# Altium PCB Main_Board.PcbDoc
Units mil, origin at the board's own origin, x right, y up, seen from the top; angles counter-clockwise.
Board outline 3000 x 2500 mil, 2 copper layers (Top Layer, Bottom Layer); 24 components, 27 nets, 88 pads, 3 vias.
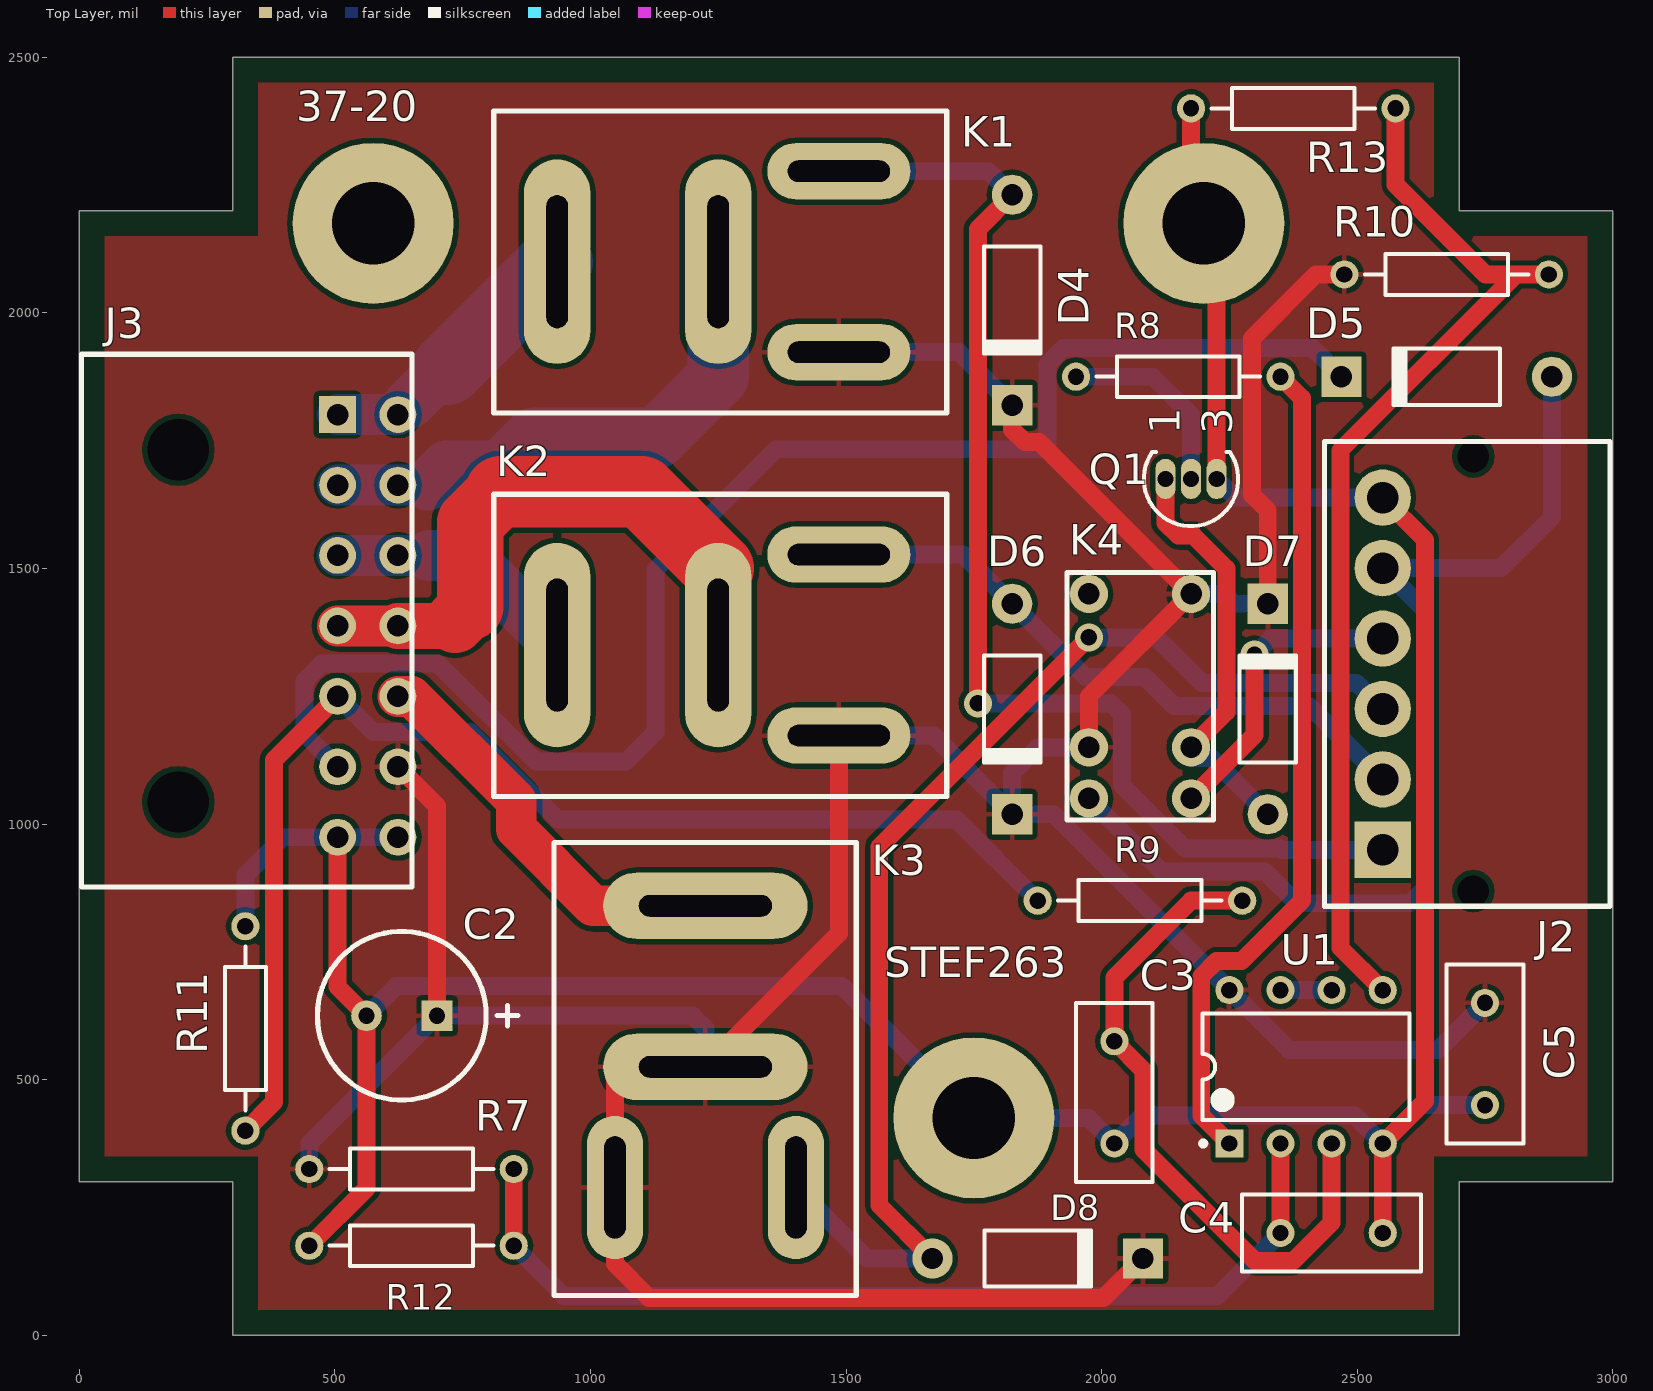
[diagram p0: Top Layer view]
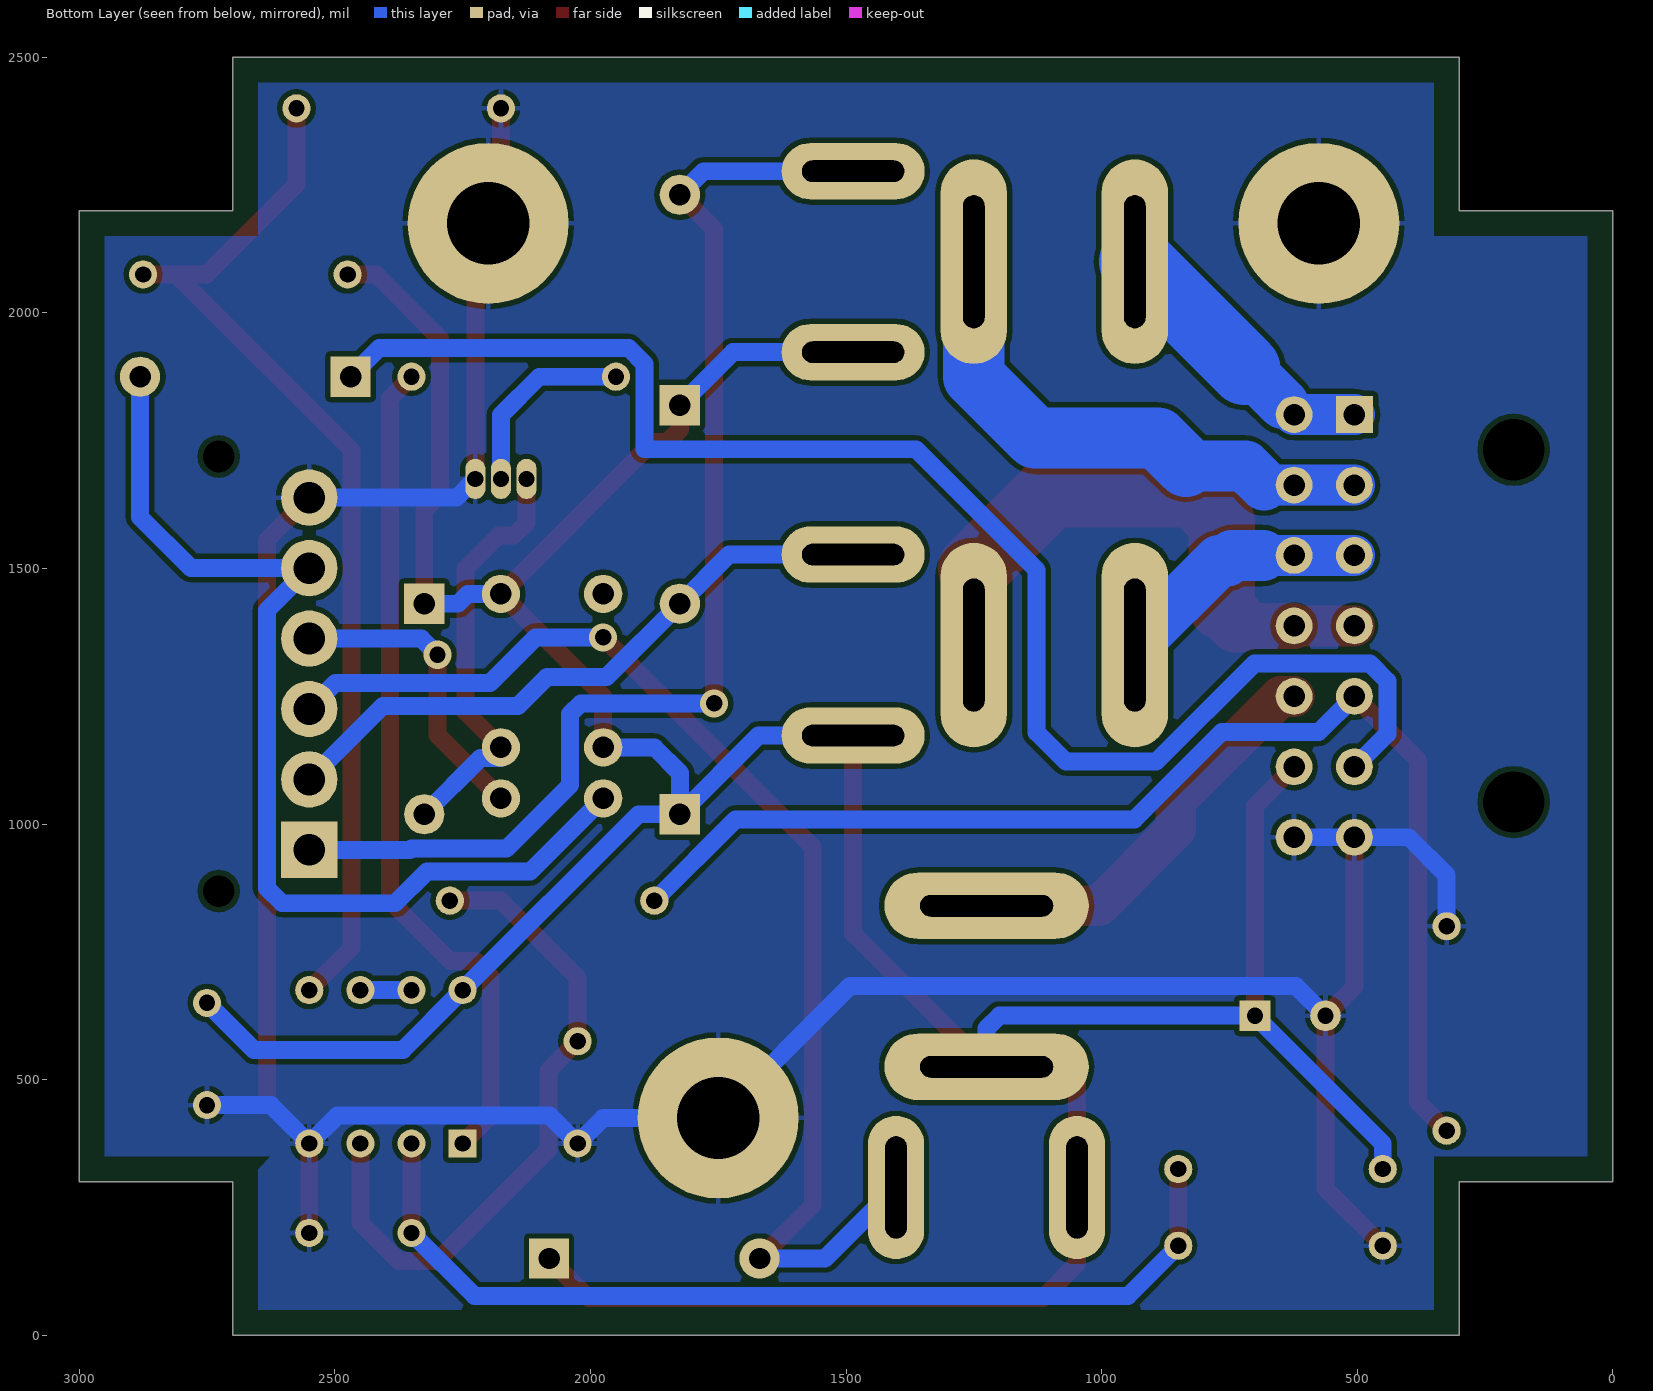
[diagram p1: Bottom Layer view, seen from below]

## Layer stack, top to bottom
Top Solder: solder mask 0.4, Solder Resist, Dk 3.5
Top Layer: signal copper 1.4
Dielectric 1: dielectric 12.6, FR-4, Dk 4.8
Bottom Layer: signal copper 1.4
Bottom Solder: solder mask 0.4, Solder Resist, Dk 3.5

## Board outline
300,0 300,300 0,300 0,2200 300,2200 300,2500 2700,2500 2700,2200 3000,2200 3000,300 2700,300 2700,0

## Design rules (kind name [scope] priority, off if disabled: settings)
Clearance [All] p1: gap=10 ignorepadtopadclearanceinfootprint=FALSE
HoleSize [All] p1: absolutevalues=TRUE maxlimit=250 minlimit=1 maxpercent=80.000 minpercent=20.000
PolygonConnect [All] p1: connectstyle=Relief reliefconductorwidth=10 reliefentries=4 polygonreliefangle="90 Angle" airgapwidth=10
RoutingVias [All] p1: holewidth=32 width=55 viastyle="Through Hole" minholewidth=32 minwidth=55 maxholewidth=32 maxwidth=55
SolderMaskExpansion [All] p1: expansion=4
Width [All] p1: maxlimit=200 minlimit=20 preferedwidth=35
29 further rules are at their usual default settings.

## Components (designator, comment, footprint, x,y, rotation, side; value= is the part's Value field where it differs from the comment)
C2 "Cap Pol1" RB_3.5MM 700,625 r180 top value=100uF/25V
C3 "Cap" RAD-0.2 2025,475 r90 top value=1uF/16V
C4 "Cap" RAD-0.2 2450,200 r180 top value=1uF/16V
C5 "Cap" RAD-0.2 2750,550 r90 top value=1uF/16V
D4 "1N4001" DO-41 1825,2025 r270 top
D5 "1N4001" DO-41 2675,1875 r180 top
D6 "1N4001" DO-41 1825,1225 r270 top
D7 "1N4001" DO-41 2325,1225 r90 top
D8 "1N4001" DO-41 1875,150 r0 top
J2 "FP_CONNECTOR" MOLEX_5329_6POS_RA 2727.17,868.7 r90 top
J3 "Molex 1723161114" MOLEX_ULTRA_FIT_14_POS_RA 505.42,1800.87 r270 top
K1 "ACV31012" RL_MICRO_ISO_ACV 1486,2277 r180 top
K2 "ACV31012" RL_MICRO_ISO_ACV 1486,1527 r180 top
K3 "ACV31012" RL_MICRO_ISO_ACV 1402,289 r90 top
K4 "G5V-1-2 DC12" RL_G5V-1 2175,1050 r90 top
Q1 "2N3904" TO-92 2175,1675 r90 top
R7 "Res1" AXIAL-0.4 650,325 r0 top value=8.2K
R8 "Res1" AXIAL-0.4 2150,1875 r180 top value=10K
R9 "Res1" AXIAL-0.4 2075,850 r180 top value=10K
R10 "Res1" AXIAL-0.4 2675,2075 r0 top value=10K
R11 "Res1" AXIAL-0.4 325,600 r270 top value=10K
R12 "Res1" AXIAL-0.4 650,175 r180 top value=1K
R13 "Res1" AXIAL-0.4 2375,2400 r0 top value=10K
U1 "LM358" DIP-8 2400,525 r90 top

## Footprints (in the part's own frame and the unit in brackets; to place one, negate y for a bottom-side part, rotate by r counter-clockwise, add the part's x,y. Pads: shape width x height; smd on the part's side, far side on the other; paste and mask are expansions set on the pad)
AXIAL-0.4 [mm] "Axial Device, Thru-Hole; 2 Leads; 0.4 in Pin Spacing"
  round 1.4 hole 0.813: 1(-5.08,0) 2(5.08,0)
  silkscreen extent -4.06,-1.02 4.06,1.02
DIP-8 [mil] "DIP; 8 Leads; Row Spacing 7.62 mm; Pitch 2.54 mm"
  rect 55x55 hole 32: 1(-150,150)
  round 55 hole 32: 2(-150,50) 3(-150,-50) 4(-150,-150) 5(150,-150) 6(150,-50) 7(150,50) 8(150,150)
  silkscreen extent -155,-203 104,206, body extent -142,-203 142,203, height 200
DO-41 [mm] "Diode, Axial; Body 5.2 x 2.7 mm (LxDia. max), Lead Dia. 0.86 mm (max)"
  round 2 hole 1.067: 1(-5.23,0)
  rect 2x2 hole 1.067: 2(5.23,0)
  silkscreen extent -2.65,-1.4 2.75,1.4
MOLEX_5329_6POS_RA [mm]
  rect 2.8x2.8 hole 1.575: 1(2.05,4.5)
  round 2.8 hole 1.575: 2(5.55,4.5) 3(9.05,4.5) 4(12.55,4.5) 5(16.05,4.5) 6(19.55,4.5)
  round 0 hole 1.575: ""(0,0) ""(21.6,0)
  silkscreen extent -0.75,-6.8 22.35,7.4
MOLEX_ULTRA_FIT_14_POS_RA [mil]
  rect 72x72 hole 42: 1(0,0)
  round 72 hole 42: 2(0,118.11) 3(137.8,0) 4(137.8,118.11) 5(275.59,0) 6(275.59,118.11) 7(413.39,0) 8(413.39,118.11) 9(551.18,0) 10(551.18,118.11) 11(688.98,0) 12(688.98,118.11) 13(826.77,0) 14(826.77,118.11)
  round 0 hole 120: ""(68.9,-311.42) ""(757.87,-311.42)
  silkscreen extent -118,-501 924,145
RAD-0.2 [mil] "Radial Cap, Thru-Hole; 2 Leads; 0.2 in Pin Spacing"
  round 55 hole 32: 1(-100,0) 2(100,0)
  silkscreen extent -175,-75 175,75
RB_3.5MM [mil]
  rect 60x60 hole 32: 1(0,0)
  round 60 hole 32: 2(138,0)
  silkscreen extent -158,-165 234,165
RL_G5V-1 [mil]
  round 75 hole 42: 1(0,0) 2(100,0) 5(400,0) 6(400,200) 9(100,200) 10(0,200)
  silkscreen extent -42,-44 442,243
RL_MICRO_ISO_ACV [mil] "Micro-ISO Relay ACV series"
  oval 280x110 hole 42 slot 200 at 0 deg: 1(0,0) 2(0,354)
  oval 130x400 hole 42 slot 260 at 90 deg: 3(551,177) 5(236,177)
  silkscreen extent -211,-118 675,473
TO-92 [mm] "TO, Flat Index; 3 In-Line, Axial Leads; Body Dia. 4.6mm; Leads 0.41 x 0.39 mm (max)"
  oval 2x1 hole 0.813: 1(0,1.27) 2(0,0) 3(0,-1.27)
  silkscreen extent -2.34,-2.34 1.35,2.34

## Part data
C2: "UBW1E101MPD1TD", LatestRevisionDate=17-Jul-2002, LatestRevisionNote="Re-released for DXP Platform.", PackageDescription="Polarized Capacitor (Radial); 2 Leads", PackageReference=RB7.6-15, Published=8-Jun-2000, Publisher="Altium Limited"
C3 C4 C5: "FA26X8R1E105KNU06", LatestRevisionDate=17-Jul-2002, LatestRevisionNote="Re-released for DXP Platform.", PackageDescription="Radial Cap, Thru-Hole; 2 Leads; 0.3 in Pin Spacing", PackageReference=RAD-0.3, Published=8-Jun-2000, Publisher="Altium Limited"
D4 D5 D6 D7 D8: library part "Diode 1N4001", "1 Amp General Purpose Rectifier", Code_JEDEC=DO-204-AL, ComponentLink1Description="Manufacturer Link", ComponentLink1URL=http://www.fairchildsemi.com/, ComponentLink2Description=Datasheet, ComponentLink2URL=http://www.fairchildsemi.com/ds/1N%2F1N4001.pdf, DatasheetVersion=1998, LatestRevisionDate=17-Jul-2002, LatestRevisionNote="Re-released for DXP Platform.", PackageDescription="Diode, Axial; Body 5.2 x 2.7 mm (LxDia. max), Lead Dia. 0.86 mm (max)", PackageReference=DO-41, PackageVersion=Aug-1999, Published=8-Jun-2000, Publisher="Altium Limited"
J2: library part "Header 6", "Header, 6-Pin", LatestRevisionDate=17-Jul-2002, LatestRevisionNote="Re-released for DXP Platform.", Publisher="Altium Limited"
J3: library part "Header 7X2", "Header, 7-Pin, Dual row", LatestRevisionDate=17-Jul-2002, LatestRevisionNote="Re-released for DXP Platform.", Publisher="Altium Limited"
K1 K2 K3: library part Relay-SPST, "Single-Pole Single-Throw Relay", LatestRevisionDate=17-Jul-2002, LatestRevisionNote="Re-released for DXP Platform.", PackageReference=MODULE4, Published=24-Mar-1999, Publisher="Altium Limited"
K4: library part Relay-SPDT, "Single-Pole Dual-Throw Relay", LatestRevisionDate=17-Jul-2002, LatestRevisionNote="Re-released for DXP Platform.", PackageReference=MODULE5B, Published=24-Mar-1999, Publisher="Altium Limited"
Q1: library part NPN, "NPN Bipolar Transistor", Code_JEDEC=TO-226-AA, LatestRevisionDate=17-Jul-2002, LatestRevisionNote="Re-released for DXP Platform.", PackageDescription="TO, Flat Index; 3 In-Line, Axial Leads; Body Dia. 4.8mm; Leads 0.55 x 0.51 mm (max)", PackageReference=TO-226-AA, Published=8-Jun-2000, Publisher="Altium Limited"
R7 R8 R9 R10 R11 R12 R13: "Resistor", LatestRevisionDate=17-Jul-2002, LatestRevisionNote="Re-released for DXP Platform.", PackageDescription="Axial Device, Thru-Hole; 2 Leads; 0.3 in Pin Spacing", PackageReference=AXIAL-0.3, Published=8-Jun-2000, Publisher="Altium Limited"

## Free pads (board coordinates)
  round 315 hole 161: ""(575,2175) ""(1750,425) ""(2200,2175)

## Via types
v1: diameter 55, hole 32, Top Layer to Bottom Layer, 3 vias

## Nets (pads, with @x,y where several pads share a name; then routed paths per layer and width w, separated by ;. In a path a pad name is that pad's centre, name@x,y a point inside that pad or via, vN(x,y) a via of type N, cw(c..) or ccw(c..) an arc to the next point about the centre after c; other vN are vias at no path point)
ACC: C2.1 C5.2 D4.2 D6.2 D7.2 D8.2 J3.12 K1.2 K2.2 K3.2 K3.5 K4.5 K4.9 R7.1 R10.1 U1.8 | length 7969.6
  Top Layer w35: J3.12 700,1035.43 C2.1 ; K2.2 1486,786 K3.5 1048,525 K3.2 1048,140 1115,73 2003.91,73 D8.2 ; D4.2 1825,1772 1850,1747 1878,1747 K4.5 1975,1250 K4.9 ; D7.2 2325,1613 2294,1644 2294,1950 2419,2075 R10.1
  Bottom Layer w35: R7.1 450,375 C2.1 1200,625 1225,600 K3.5 ; K2.2 1671.09,1173 D6.2 ; K1.2 1721.09,1923 D4.2 ; K4.9 1875,1150 1825,1100 D6.2 ; K4.5 2240,1450 2259.09,1430.91 D7.2 ; C5.2 2658,558 2367,558 U1.8 1905.91,1019.09 D6.2
BL_LED: J2.4 K4.1 | length 596.5
  Top Layer w35: K4.1 2299,1174 v1(2299,1331)
  Bottom Layer w35: v1(2299,1331) 2330.8,1362.8 J2.4
GND: C2.2 C3.1 C4.1 C5.1 J2.6 J3.13 J3.14 pad. Q1.3 R11.1 R12.2 R13.1 U1.4 | length 6322.1
  Top Layer w35: R12.2 562,287 C2.2 505.42,681.58 J3.13 ; R13.1 2175,2175 2200,2175 2225,2150 Q1.3 ; C4.1 U1.4 2633,458 2633,1555.39 J2.6
  Bottom Layer w35: R11.1 325,900 399.1,974.1 J3.13 J3.14 ; C2.2 620,683 1492,683 1750,425 1975,425 C3.1 2080,430 2495,430 U1.4 2625,450 C5.1 ; Q1.3 2261.61,1638.39 J2.6
HEAT_SW: D6.1 J2.2 K2.1 | length 1246.2
  Bottom Layer w35: K2.1 1728.91,1527 D6.1 1968.53,1287.37 2085,1287.37 2141.37,1231 2406.2,1231 J2.2
HEATER_PWR: J3.7 J3.8 K2.5 | length 1162.1
  Top Layer w80: J3.7 J3.8 ; 727.49,1387.49 735,1395
  Top Layer w90: J3.8 727.49,1387.49
  Top Layer w120: 735,1395 765,1425 ; K2.5 K2.5@1250,1500
  Top Layer w130: 765,1425 765,1590 825,1650
  Top Layer w140: 825,1650 1100,1650 K2.5@1250,1500
ILLUMINATION: J3.9 R9.2 R11.2 | length 2459.6
  Top Layer w35: R11.2 381,456 381,1125.27 J3.9
  Bottom Layer w35: J3.9 575.11,1180 765,1180 936,1009 1716,1009 R9.2
NetC3_2: C3.2 R9.1 U1.3 | length 1317.1
  Top Layer w35: R9.1 2175,850 2025,700 C3.2 2082,518 2082,363 2300,145 2375,145 2450,220 U1.3
NetC4_2: C4.2 R7.2 R12.1 U1.2 | length 1916.5
  Top Layer w35: R12.1 R7.2 ; C4.2 U1.2
  Bottom Layer w35: R12.1 948,77 2227,77 C4.2
NetD1_1: 
NetD1_4: 
NetD2_1: 
NetD2_4: 
NetD3_1: 
NetD3_4: 
NetD7_1: D7.1 K4.2 Q1.1 | length 837
  Top Layer w35: Q1.1 2125,1589 2150,1564 2180,1564 2244,1500 2244,1219 K4.2
  Bottom Layer w35: K4.2 2175,1129 2215.09,1129 D7.1
NetQ1_2: Q1.2 R8.2 | length 381.1
  Bottom Layer w35: R8.2 2100,1875 2175,1800 Q1.2
NetR8_1: R8.1 U1.1 | length 1650.5
  Top Layer w35: U1.1 2195,430 2195,702 2225,732 2274,732 2392,850 2392,1833 R8.1
NetR10_2: R10.2 R13.2 U1.5 | length 2098.8
  Top Layer w35: U1.5 2467,758 2467,1731 2811,2075 ; R13.2 2575,2251 2751,2075 2811,2075 ; R10.2 2811,2075
NetU1_6: U1.6 U1.7 | length 100
  Bottom Layer w35: U1.7 U1.6
NIGHT_LIGHT: D5.2 J3.11 | length 2958.9
  Bottom Layer w35: J3.11 441,1176.32 441,1280 475,1314 701,1314 893,1122 1070,1122 1127,1179 1127,1497 1363,1733 1894,1733 1894,1900 1925,1931 2413.09,1931 D5.2
NOS_PWR: J3.3 J3.4 K1.5 | length 1057.4
  Bottom Layer w80: J3.3 J3.4 681.92,1663.08
  Bottom Layer w100: 681.92,1663.08 718.84,1700 835,1700
  Bottom Layer w120: 835,1700 890,1755 1130,1755 1250,1875 K1.5
NOS_SW: D4.1 J2.1 K1.1 | length 2372.9
  Top Layer w35: v1(1758,1236) 1758,2163.91 D4.1
  Bottom Layer w35: K1.1 1778.91,2277 D4.1 ; v1(1758,1236) 2019,1236 2040,1215 2040,1076 2163.78,952.22 2349.78,952.22 2352.59,949.41 J2.1
PURGE_PWR: J3.10 K3.3 | length 803.4
  Top Layer w35: K3.3@1100,840 K3.3
  Top Layer w80: J3.10 650.31,1249.69 855,1045 855,990 1005,840 K3.3@1100,840
PURGE_SW: D8.1 J2.3 K3.1 | length 2385.6
  Top Layer w35: D8.1 1565,254.09 1565,955 v1(1975,1365)
  Bottom Layer w35: K3.1 1541,150 D8.1 ; v1(1975,1365) 2107.47,1365 2196.47,1276 2499,1276 J2.3
RD_LED: D5.1 J2.5 K4.10 | length 2062.4
  Bottom Layer w35: K4.10 2117.78,907.22 2319.78,907.22 2382,845 2603,845 2633,875 2633,1417.59 J2.5 2781.5,1500.59 2880.91,1600 D5.1
VCC_HEATER: J3.5 J3.6 K2.3 | length 502.2
  Bottom Layer w80: J3.5 J3.6 684.72,1525.28
  Bottom Layer w100: 684.72,1525.28 744.72,1525.28 755,1515 770,1515 K2.3
VCC_NOS: J3.1 J3.2 K1.3 | length 555.6
  Bottom Layer w80: J3.1 J3.2 J3.2@645,1822.35 ; 712.65,1890 720,1890
  Bottom Layer w100: J3.2@645,1822.35 712.65,1890
  Bottom Layer w140: 720,1890 932.5,2102.5 K1.3
pads on no net: J2. J3. K4.6

## Polygon pours and split planes (outlines as drawn)
GND on Bottom Layer "bottom_layer_gnd" (solid, remove dead copper, pour order 28): 350,350 350,50 2650,50 2650,325 2625,350 2950,350 2950,2150 2650,2150 2650,2450 350,2450 350,2150 50,2150 50,350
ACC on Top Layer "top_layer_acc" (solid, remove dead copper, pour order 26): 50,350 350,350 350,50 2650,50 2650,350 2950,350 2950,2150 2650,2150 2650,2450 350,2450 350,2150 50,2150

## Silkscreen, mask and mechanical layers (free items; w line width, h text height)
Top Overlay:
  text "37-20" at 425,2375 h60
  text "STEF263" at 1575,700 h60
Top Solder:
  lines w50: 623.53,1111.9 638.1,1111.9 ; 623.53,1249.69 650.31,1249.69 815,1085 850,1050 850,1000 1010,840
  lines w80: 505.42,1387.49 623.53,1387.49 732.49,1387.49 765,1420
  lines w100: 765,1420 765,1590 820,1645 1105,1645 1250,1500 1250,1350
Bottom Solder:
  lines w60: 925,2100 935,2100
  lines w80: 505.42,1525.28 623.53,1525.28 744.72,1525.28 755,1515 770,1515 935,1350 ; 505.42,1663.08 683.08,1663.08 720,1700 830,1700 880,1750 1125,1750 1175,1800 1250,1875 1250,2100 ; 505.42,1800.87 625.87,1800.87 925,2100
ToolPath:
  lines w10: -5,300 ccw(c0,300) 0,295 ; -5,300 ccw(c0,300) 0,295 ; -5,300 -5,2200 ; -5,2200 cw(c0,2200) 0,2205 ; -5,2200 cw(c0,2200) 0,2205 ; 0,295 295,295 295,0 ; 0,2205 295,2205 295,2500 ; 295,0 ccw(c300,0) 300,-5 ; 295,0 ccw(c300,0) 300,-5 ; 295,2500 cw(c300,2500) 300,2505 ; 295,2500 cw(c300,2500) 300,2505 ; 300,-5 2700,-5 ; 300,2505 2700,2505 ; 2700,-5 ccw(c2700,0) 2705,0 ; 2700,-5 ccw(c2700,0) 2705,0 ; 2700,2505 cw(c2700,2500) 2705,2500 ; 2700,2505 cw(c2700,2500) 2705,2500 ; 2705,0 2705,295 3000,295 ; 2705,2500 2705,2205 3000,2205 ; 3000,295 ccw(c3000,300) 3005,300 ; 3000,295 ccw(c3000,300) 3005,300 ; 3000,2205 cw(c3000,2200) 3005,2200 ; 3000,2205 cw(c3000,2200) 3005,2200 ; 3005,300 3005,2200

## Text inside footprints (layer, text, board x,y; h text height)
Q1: Top Overlay "1" at 2152.95,1762.56 h59.05 r90; Top Overlay "3" at 2255.12,1762.56 h59.05 r90